# Altium PCB BMS_V3.PcbDoc (part 2 of 2)
Units mil, origin at the board's own origin, x right, y up, seen from the top; angles counter-clockwise.
Board outline 3937.01 x 3137.8 mil, 2 copper layers (Top Layer, Bottom Layer), stack 62.181 mil thick; 110 components, 133 nets, 421 pads, 75 vias.
Unrouted connection lines stored in the file: 4.
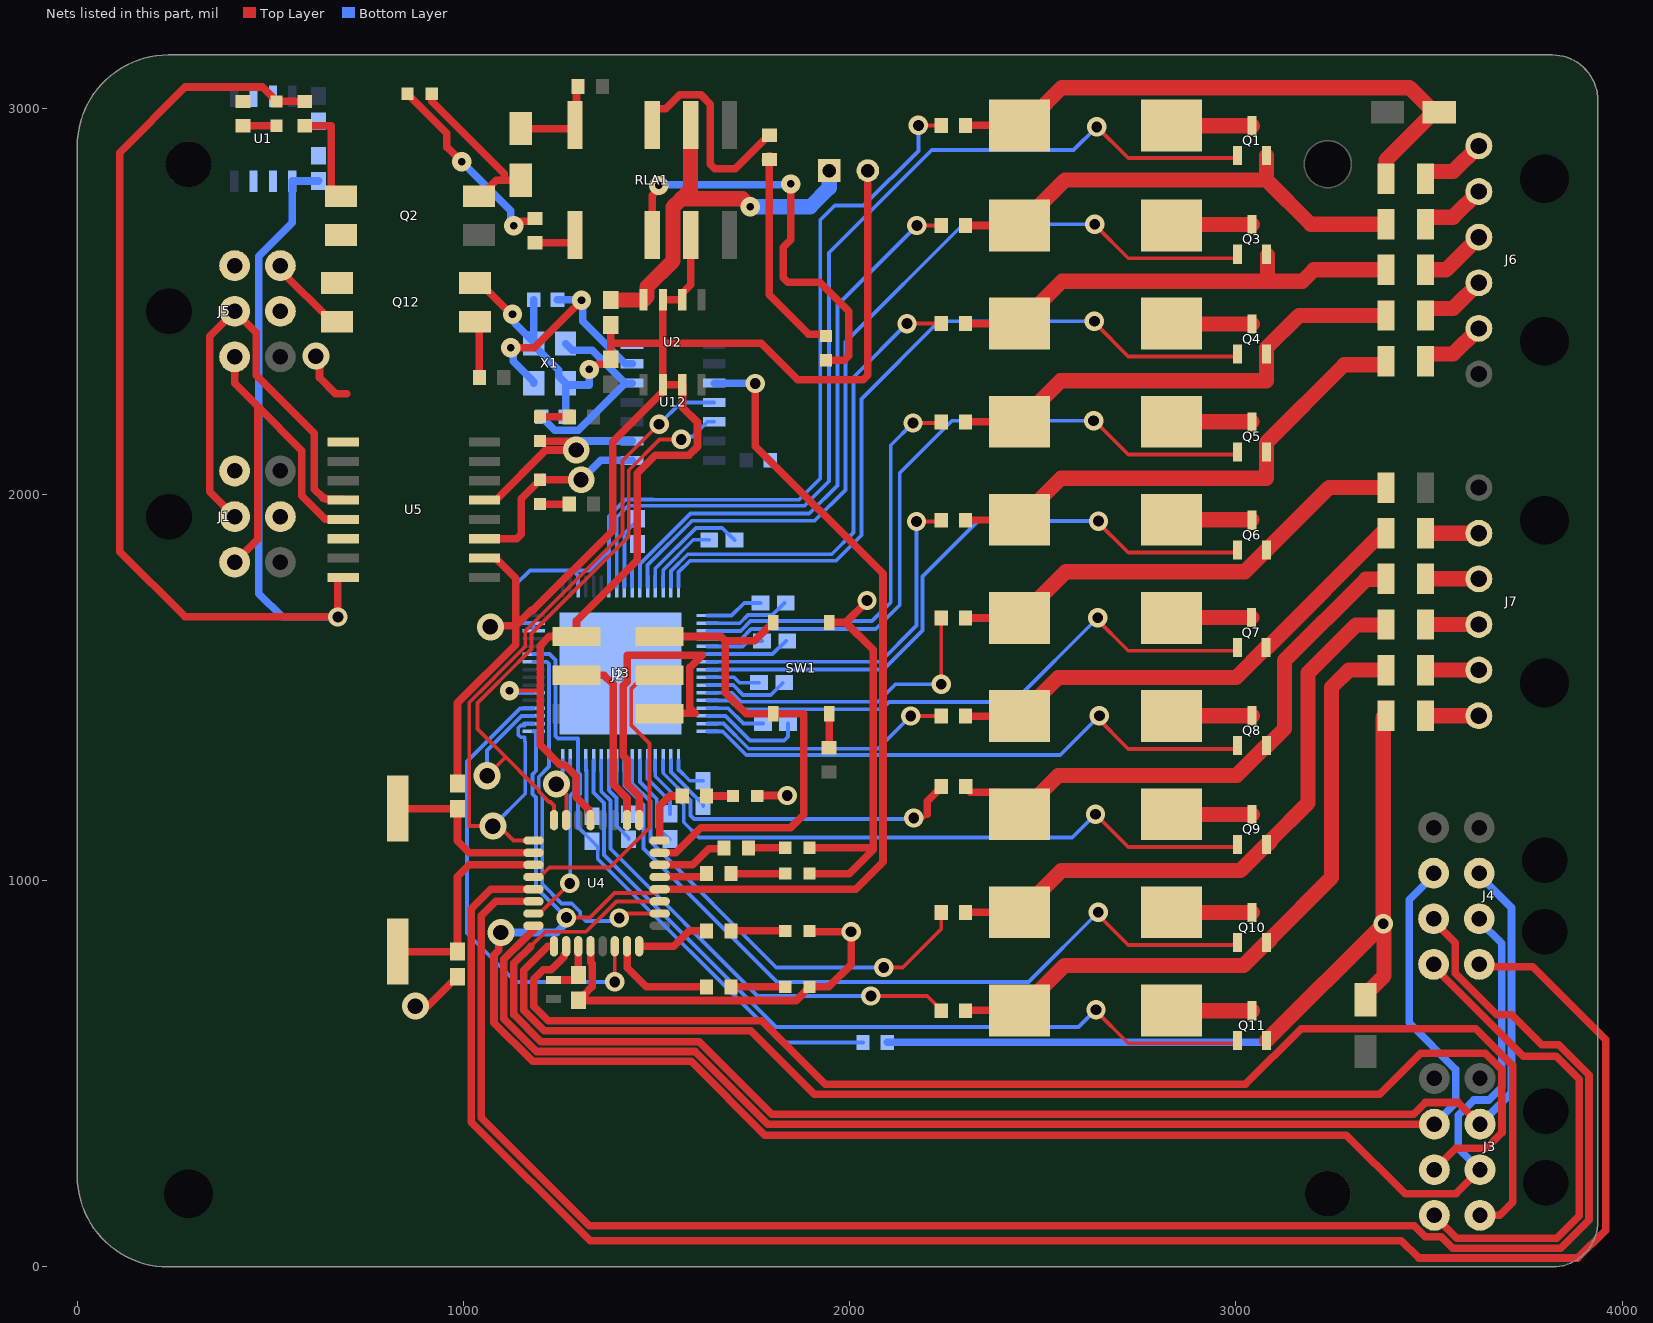
[diagram p2: the nets of this part, all layers, seen from the top]

## Via types
v1: diameter 50, hole 19.68, Top Layer to Bottom Layer, 25 vias
v2: diameter 50, hole 28, Top Layer to Bottom Layer, 24 vias
v3: diameter 50, hole 27.99, Top Layer to Bottom Layer, 14 vias
v4: diameter 70, hole 40, Top Layer to Bottom Layer, 8 vias
v5: diameter 68.9, hole 39.37, Top Layer to Bottom Layer, 4 vias

## Nets (pads, with @x,y where several pads share a name; then routed paths per layer and width w, separated by ;. In a path a pad name is that pad's centre, name@x,y a point inside that pad or via, vN(x,y) a via of type N, cw(c..) or ccw(c..) an arc to the next point about the centre after c; other vN are vias at no path point) (continued)
GLV_5V: C1.2 LED1.2 R4.2 U1.1 U5.16 | length 3750.2
  Top Layer w19.68: R4.2@589.17,3017.54 LED1.2@516.34,3017.54 478.94,3054.94 280.12,3054.94 109.84,2884.67 109.84,1852.18 279.15,1682.87 v2(674.8,1682.87) 674.8,1783.46 676.77,1785.43 U5.16@688.98,1785.43
  Bottom Layer w19.68: C1.2@624.61,2811.81 624.24,2811.45 557.01,2811.45 U1.1@556.64,2811.08 556.64,2703.51 470.01,2616.88 470.01,1743.42 530.56,1682.87 v2(674.8,1682.87)
GLV_GND: C1.1 C2.1 J1.3 J1.5 J5.3 J5.5 Q2.2 Q12.3 R6.1 U1.2 U1.3 U1.6 U1.7 U5.9 U5.14 | length 147.1
  Top Layer w19.68: v4(617.72,2358.07) 627.34,2348.44 627.34,2302.2 668.7,2260.85 697.44,2260.85
GND: C3.1 C4.1 C9.1 C17.1 C18.1 C22.2 C23.1 C24.1 J2.6 J3.8 J4.8 LED3.1 LED4.1 LED5.1 LED6.1 LED7.1 P1.2 Q12.2 RLA1.3 SW1.4 U2.2 U2.3 U2.6 U2.7 U3.6 U4.5 U4.20 U5.2 U12.7 X1.2 X1.4 | length 9385.5
  Top Layer w10: v1(1119.09,1492.13) 1197.29,1492.13 1198.28,1493.11
  Top Layer w19.68: v4(875.63,675.05) 907.94,675.05 C17.1@984.47,751.59 ; C18.1@984.47,1251.59 984.47,1460.07 1135.43,1611.03 1135.43,1660.26 ; Q12.2@1030.12,2547.05 1042.91,2547.05 1123.43,2466.54 v1(1126.97,2466.54) ; U5.2@1054.33,1835.43 1083.07,1835.43 1135.43,1783.07 1135.43,1660.26 ; v4(1069.49,1657.28) 1072.46,1660.26 1135.43,1660.26 ; v1(1325.34,2323.64) 1333.55,2323.64 1346.98,2337.08 1371.64,2337.08 1381.3,2346.74 C4.1@1381.3,2350.24 1381.3,2392.54 ; U4.20@1328.91,830.33 1329.28,829.95 1329.28,789.2 1333.18,785.31 1333.18,726.19 1310.9,703.91 1307.49,703.91 1297.83,694.25 C9.1@1297.83,690.75 1298.72,689.86 1861.13,689.86 LED4.1@1896.26,725 1945.45,725 2003.54,783.09 v3(2003.54,867.82) 1898.45,867.82 LED5.1@1896.26,870.01 ; U4.5@1328.91,1157.1 1328.91,1173.38 1324.08,1178.21 1324.08,1183.89 1291.59,1216.38 1291.59,1270.88 1261.81,1300.67 1249.05,1300.67 1198.28,1351.44 1198.28,1493.11 1198.28,1607.94 1222.64,1632.3 J2.6@1292.72,1632.3 1292.72,1673.25 1449.61,1830.14 1449.61,2055.14 1496.16,2101.69 1583.76,2101.69 1605.91,2123.84 1605.91,2187.32 1567,2226.23 1567,2283.1 U2.3@1566.34,2283.76 U2.2@1516.34,2283.76 ; C3.1@1381.3,2438.76 1381.3,2392.54 ; U2.7@1516.34,2486.26 1516.34,2393.52 1518.31,2391.56 ; U2.7@1516.34,2503.76 U2.6@1566.34,2503.76 1566.34,2521.26 1587.99,2542.91 RLA1.3@1587.99,2671.28 ; LED7.1@1760.43,1219.42 1761.54,1220.52 v3(1838.19,1220.52) ; LED6.1@1896.26,1018.52 1998.62,1018.52 2060.54,1080.44 ; LED3.1@1896.26,1085.45 2055.52,1085.45 2060.54,1080.44 ; SW1.4@1947.44,1668.52 1989.37,1668.52 ; v3(2044.88,1725.22) 2044.88,1724.04 1989.37,1668.52 ; P1.2@2046.85,2838.41 2046.85,2308.6 2035.32,2297.07 1865.75,2297.07 1771.26,2391.56 1518.31,2391.56 ; J4.8@3511.61,777.38 3743.4,545.59 3828.83,545.59 3888.39,486.04 3888.39,132.7 3830.32,74.63 3571.46,74.63 3513.58,132.5 J3.8@3513.58,133.68 ; 1135.43,1660.26 1175.29,1700.11 1179.97,1700.11 1386.42,1906.56 1386.42,2136.34 1516.34,2266.26 U2.2@1516.34,2283.76 ; 1381.3,2392.54 1382.28,2391.56 1516.34,2391.56 ; U2.2@1516.34,2283.76 1516.34,2391.56 ; 1516.34,2391.56 1518.31,2391.56 ; 1989.37,1668.52 2060.54,1597.36 2060.54,1080.44
  Bottom Layer w10: v1(1119.09,1492.13) 1125,1486.22 1146.65,1486.22 1147.07,1486.63 U3.6@1181.69,1486.63
  Bottom Layer w19.68: v1(1126.97,2466.54) 1132.77,2460.73 1132.77,2443.48 X1.2@1181.69,2394.55 ; C23.1@1181.69,2503.76 X1.2@1181.69,2394.55 ; C24.1@1264.37,2201 X1.4@1264.37,2288.25 ; v1(1325.34,2323.64) 1325.34,2283.29 1269.34,2283.29 X1.4@1264.37,2288.25 ; X1.2@1181.69,2394.55 X1.2@1181.69,2390.62 1181.69,2386.68 1246.65,2321.72 1246.65,2305.97 X1.4@1264.37,2288.25
M\R\: J3.2 J4.2 U4.27 | length 3932.5
  Top Layer w9.84: 1173.84,829.55 1212.12,867.82 1317.21,867.82 1395.85,946.47 U4.27@1508.04,946.47
  Top Layer w19.68: 1173.84,829.55 1130.32,786.03 1130.32,653.74 1200.58,583.48 1610.73,583.48 1798.63,395.59 3460.29,395.59 3490.45,425.74 3575.93,425.74 J3.2@3631.77,369.9
  Bottom Layer w19.68: J4.2@3629.8,1013.6 3713.3,930.11 3713.3,451.43 J3.2@3631.77,369.9
MISO: U3.3 U4.8 U12.12 | length 1813.4
  Top Layer w9.84: v4(1061.08,1271.72) 1109.33,1319.97 1177.51,1251.79 ; U4.8@1234.42,1157.1 1234.42,1195.13 1225.65,1203.9 1221.73,1203.9 1194.83,1230.8 1194.83,1234.72 1177.63,1251.91 1109.45,1320.09 1036.42,1393.13 1036.42,1460.25 1083.17,1507 1104.22,1528.05 1175.88,1599.71 1175.88,1639.68 1427.76,1891.56 1427.76,2062.65 1507.64,2142.54 v3(1563.58,2142.54)
  Bottom Layer w9.84: v4(1061.08,1271.72) 1061.08,1337.37 1149.92,1426.21 1181.27,1426.21 U3.3@1181.69,1426.63 ; v3(1563.58,2142.54) 1571.27,2150.22 1593.54,2150.22 1631.57,2188.25 U12.12@1649.29,2188.25
MISO_A: J2.1 U4.1 | length 940.6
  Top Layer w19.68: U4.1@1454.89,1157.1 1454.89,1218.75 1423.94,1249.7 1423.94,1313.13 1413.39,1323.68 1413.39,1504.98 1423.94,1515.53 1423.94,1583.48 1617.72,1583.48 1586.12,1551.89 1586.12,1447.37 1599.8,1433.68 1509.06,1433.68 J2.1@1507.68,1432.3 J2.1@1545.28,1432.3
MOSI: U3.2 U4.9 U12.11 | length 1941.8
  Top Layer w9.84: U4.9@1181.27,1103.95 1129.73,1103.95 1092.15,1141.54 v4(1076.38,1141.54) 1014.89,1141.54 1014.89,1461.13 1067.33,1513.57 1097.65,1543.89 1160.04,1606.28 1160.04,1646.48 1411.91,1898.35 1411.91,2087.33 v3(1506.5,2181.91)
  Bottom Layer w9.84: v4(1076.38,1141.54) 1160.04,1225.2 1160.04,1359.34 1158.8,1360.59 1158.8,1371.21 1148.17,1371.21 1141.77,1377.61 1141.77,1395.66 1148.17,1402.06 1158.8,1402.06 1158.8,1406.63 U3.2@1181.69,1406.63 ; v3(1506.5,2181.91) 1562.84,2238.25 U12.11@1649.29,2238.25
MOSI_A: J2.4 U4.2 | length 471
  Top Layer w19.68: J2.4@1292.72,1532.3 1363.78,1532.3 1387.71,1508.37 1387.71,1249.61 1423.39,1213.92 U4.2@1423.39,1157.1
NetC3_2: C3.2 P1.1 RLA1.6 U2.8 | length 1044.7
  Top Layer w39.37: C3.2@1381.3,2503.76 U2.8@1466.34,2503.76 1467.21,2503.76 1475.52,2512.07 1475.52,2537.77 1542.62,2604.87 1542.62,2744.12 1563.83,2765.33 ; RLA1.6@1587.99,2956.32 1587.99,2789.49 1563.83,2765.33 ; v1(1742.72,2744.9) 1722.29,2765.33 1563.83,2765.33
  Bottom Layer w39.37: v1(1742.72,2744.9) 1897.73,2744.9 1946.85,2794.02 P1.1@1946.85,2838.41
NetC5_1: C5.1 U3.38 | length 217.2
  Bottom Layer w9.84: U3.38@1631.69,1586.63 1800.46,1586.63 C5.1@1834.71,1620.89
NetC5_2: C5.2 U3.37 | length 147.4
  Bottom Layer w9.84: U3.37@1631.69,1606.63 1722.56,1606.63 1736.81,1620.89 C5.2@1773.21,1620.89
NetC6_1: C6.1 U3.34 | length 220.9
  Bottom Layer w9.84: U3.34@1631.69,1666.63 1715.35,1666.63 1736.62,1687.91 1799.37,1687.91 C6.1@1830.77,1719.31
NetC6_2: C6.2 U3.33 | length 151.1
  Bottom Layer w9.84: U3.33@1631.69,1686.63 1694.29,1686.63 1726.97,1719.31 C6.2@1769.27,1719.31
NetC7_1: C7.1 U3.30 | length 194.3
  Bottom Layer w9.84: U3.30@1517.11,1762.06 1517.11,1804.73 1595.08,1882.7 C7.1@1636.4,1882.7
NetC7_2: C7.2 U3.29 | length 307.6
  Bottom Layer w9.84: U3.29@1496.69,1761.63 1496.69,1807.93 1601.88,1913.12 1669.99,1913.12 C7.2@1701.4,1881.71
NetC8_1: C8.1 U3.26 | length 115.9
  Bottom Layer w9.84: U3.26@1436.69,1761.63 1436.69,1822.18 1450.48,1835.97 C8.1@1450.48,1871.85
NetC8_2: C8.2 U3.25 | length 189.2
  Bottom Layer w9.84: U3.25@1416.69,1761.63 1416.69,1899.65 1450.39,1933.35 C8.2@1450.39,1936.85
NetC9_2: C9.2 L1.2 U4.19 | length 144.2
  Top Layer w9.84: C9.2@1284.17,742.93 C9.2@1297.41,756.17
  Top Layer w19.68: L1.2@1232.87,742.93 C9.2@1284.17,742.93 ; C9.2@1297.41,756.17 U4.19@1297.41,830.33
NetC10_1: C10.1 U3.42 | length 218.8
  Bottom Layer w9.84: U3.42@1631.69,1506.63 1698.27,1506.63 1723.78,1481.12 1795.34,1481.12 C10.1@1826.83,1512.62
NetC10_2: C10.2 U3.41 | length 139.4
  Bottom Layer w9.84: U3.41@1631.69,1526.63 1700.68,1526.63 1714.69,1512.62 C10.2@1765.33,1512.62
NetC11_1: C11.1 U3.46 | length 272.7
  Bottom Layer w9.84: U3.46@1631.69,1426.63 1678.31,1426.63 1741.93,1363.01 1830.33,1363.01 1840.18,1372.85 C11.1@1840.18,1406.63
NetC11_2: C11.2 U3.45 | length 160.1
  Bottom Layer w9.84: U3.45@1631.69,1446.63 1684.69,1446.63 1724.69,1406.63 C11.2@1775.18,1406.63
NetC12_1: C12.1 U3.50 | length 152.1
  Bottom Layer w9.84: U3.50@1537.11,1311.21 1537.11,1281.21 1581.3,1237.03 1581.3,1236.57 1620.67,1197.2 C12.1@1620.67,1193.7
NetC12_2: C12.2 U3.49 | length 99.8
  Bottom Layer w9.84: U3.49@1556.69,1311.63 1556.69,1287.98 1585.75,1258.92 1620.45,1258.92 C12.2@1620.67,1258.7
NetC13_1: C13.1 U3.54 | length 237
  Bottom Layer w9.84: U3.54@1456.69,1311.63 1456.69,1255.33 1500.59,1211.44 1500.59,1139.13 C13.1@1533.34,1106.38
NetC13_2: C13.2 U3.53 | length 162.7
  Bottom Layer w9.84: U3.53@1476.69,1311.63 1476.69,1263.88 1535.04,1205.53 C13.2@1535.04,1173.07
NetC14_1: C14.1 U3.58 | length 225.6
  Bottom Layer w9.84: U3.58@1376.69,1311.63 1376.69,1233.96 1396.26,1214.39 1396.26,1142.21 1427.76,1110.71 C14.1@1427.76,1107.21
NetC14_2: C14.2 U3.57 | length 152.3
  Bottom Layer w9.84: U3.57@1396.69,1311.63 1396.69,1238.56 1427.76,1207.5 C14.2@1427.76,1172.21
NetC15_1: C15.1 R28.1 U3.11 U3.62 | length 1541.2
  Bottom Layer w9.84: U3.11@1181.69,1586.63 1222.83,1586.63 1238.29,1571.18 1238.29,1374.63 1244.69,1368.23 1296.69,1368.23 U3.62@1296.69,1311.63 1296.69,1281.23 1302.51,1275.41 1302.51,1224.24 1296.69,1218.42 1296.69,1138.74 C15.1@1333.27,1102.17 1347.85,1087.59 1347.85,1056.62 1822.95,581.52 R28.1@2034.06,581.52
NetC15_2: C15.2 U3.61 | length 151.3
  Bottom Layer w9.84: U3.61@1316.69,1311.63 1316.69,1287.98 1318.69,1285.98 1318.69,1181.74 C15.2@1333.27,1167.17
NetC17_2: C17.2 U4.11 Y1.2 | length 557.2
  Top Layer w19.68: Y1.2@830.31,816.79 830.52,816.59 C17.2@984.47,816.59 984.47,1009.87 1015.56,1040.96 U4.11@1181.27,1040.96
NetC18_2: C18.2 U4.10 Y1.1 | length 447
  Top Layer w19.68: Y1.1@830.31,1186.79 830.52,1186.59 C18.2@984.47,1186.59 984.47,1103.54 1015.56,1072.45 U4.10@1181.27,1072.45
NetD1_2: D1.2 F1.1 R2.2 R10.2 | length 1543.7
  Top Layer w10: R2.2@2508.57,2955.53 R2.2@2508.57,3012.68
  Top Layer w19.68: R10.2@2299.77,2955.53 R2.2@2439.67,2955.53 R2.2@2508.57,2955.53
  Top Layer w39.37: R2.2@2508.57,3012.68 2548.95,3053.07 3449.17,3053.07 3508.43,2993.81 3516.08,2993.81 3388.39,2866.11 F1.1@3388.39,2817.74
NetD2_1: D2.1 F11.1 Q11.2 R28.2 | length 2597
  Top Layer w39.37: Q11.2@3079.33,586.24 v2(3381.5,888.41) ; D2.1@3335.24,691.82 3335.24,705.82 3383.14,753.73 3383.53,753.73 3383.53,886.37 v2(3381.5,888.41) ; F11.1@3385.43,1427.19 3381.5,1423.25 v2(3381.5,888.41)
  Bottom Layer w19.68: R28.2@2097.05,581.52 3074.61,581.52 v2(3381.5,888.41)
NetD3_1: D3.1 R1.1 RLA1.8 | length 243
  Top Layer w19.68: D3.1@1148.42,2947.3 RLA1.8@1288.58,2947.3 ; RLA1.8@1288.58,2956.52 1292.72,2960.65 1292.72,3051.79 R1.1@1296.85,3055.93
NetD3_2: D3.2 LED10.1 Q2.4 | length 388.4
  Top Layer w19.68: 917.91,3018.52 1105.91,2830.53 1105.91,2813.3 ; Q2.4@1055.32,2783.88 1084.74,2813.3 1105.91,2813.3 ; D3.2@1148.42,2813.3 1105.91,2813.3
NetF1_2: F1.2 J6.1 | length 182.6
  Top Layer w39.37: F1.2@3490.75,2817.74 3490.75,2834.02 3492.72,2835.99 3562.34,2835.99 J6.1@3628.74,2902.38
NetF2_1: F2.1 Q1.2 R5.2 R13.2 | length 1313.8
  Top Layer w19.68: R13.2@2299.77,2696.27 R5.2@2439.67,2696.27 ; R5.2@2451.42,2696.27 R5.2@2508.57,2696.27
  Top Layer w39.37: R5.2@2439.67,2696.27 2557.19,2813.8 3079.33,2813.8 ; R5.2@2445.54,2690.4 R5.2@2451.42,2696.27 ; Q1.2@3079.33,2877.58 3079.33,2813.8 ; F2.1@3388.39,2699.63 3193.5,2699.63 3079.33,2813.8
NetF2_2: F2.2 J6.2 | length 182.6
  Top Layer w39.37: F2.2@3490.75,2699.63 3490.75,2715.91 3492.72,2717.88 3562.34,2717.88 J6.2@3628.74,2784.27
NetF3_1: F3.1 Q3.2 R7.2 R15.2 | length 1215.8
  Top Layer w10: Q3.2@3079.33,2621.67 Q3.2@3081.3,2619.71
  Top Layer w19.68: R15.2@2299.77,2442.26 R7.2@2439.67,2442.26
  Top Layer w39.37: R7.2@2439.67,2442.26 2549.39,2551.99 3171.85,2551.99 3201.38,2581.52 F3.1@3388.39,2581.52 ; 3081.3,2552.97 Q3.2@3081.3,2619.71
NetF3_2: F3.2 J6.3 | length 173.1
  Top Layer w39.37: F3.2@3490.75,2581.52 3544.09,2581.52 J6.3@3628.74,2666.16
NetF4_1: F4.1 Q4.2 R8.2 R16.2 | length 1252.7
  Top Layer w19.68: R16.2@2299.77,2188.25 R8.2@2439.67,2188.25
  Top Layer w39.37: R8.2@2439.67,2188.25 2545.53,2294.11 3079.33,2294.11 Q4.2@3079.33,2363.8 3079.33,2379.74 3162.99,2463.41 F4.1@3388.39,2463.41
NetF4_2: F4.2 J6.4 | length 182.6
  Top Layer w39.37: F4.2@3490.75,2463.41 3490.75,2479.69 3492.72,2481.66 3562.34,2481.66 J6.4@3628.74,2548.05
NetF5_1: F5.1 Q5.2 R14.2 R17.2 | length 1317.5
  Top Layer w19.68: R17.2@2299.77,1933.09 R14.2@2439.67,1934.24
  Top Layer w39.37: R14.2@2439.67,1934.24 2547.57,2042.15 3079.33,2042.15 Q5.2@3079.33,2110.35 3079.33,2134.67 3280.41,2335.74 3386.42,2335.74 3388.39,2337.71 F5.1@3388.39,2345.3
NetF5_2: F5.2 J6.5 | length 182.6
  Top Layer w39.37: F5.2@3490.75,2345.3 3490.75,2361.58 3492.72,2363.55 3562.34,2363.55 J6.5@3628.74,2429.94
NetF6_1: F6.1 Q6.2 R18.2 R19.2 | length 1228.4
  Top Layer w19.68: R19.2@2299.77,1680.23 R18.2@2439.67,1680.23
  Top Layer w39.37: R18.2@2439.67,1680.23 2559.45,1800.02 3023.43,1800.02 Q6.2@3079.33,1855.93 3241.14,2017.74 F6.1@3388.39,2017.74
NetF7_1: F7.1 Q7.2 R22.2 R25.2 | length 1281.3
  Top Layer w19.68: R22.2@2299.77,1426.22 R25.2@2439.67,1426.22
  Top Layer w39.37: R25.2@2439.67,1426.22 2539.84,1526.4 3000.62,1526.4 Q7.2@3078.18,1603.96 3081.13,1603.96 F7.1@3382.59,1905.42
NetF7_2: F7.2 J7.2 | length 138
  Top Layer w39.37: F7.2@3490.75,1899.63 J7.2@3628.74,1899.63
NetF8_1: F8.1 Q8.2 R24.2 R29.2 | length 1485.4
  Top Layer w19.68: R24.2@2300.2,1244.09 2300.2,1241.93 2312.76,1229.37 2382.51,1229.37 R29.2@2439.67,1172.21
  Top Layer w39.37: R29.2@2439.67,1172.21 2539.92,1272.46 3001.77,1272.46 Q8.2@3079.33,1350.02 3082.28,1350.02 3125.59,1393.33 3125.59,1569.7 3336.22,1780.33 3381.5,1780.33 3388.39,1773.44 F8.1@3388.39,1781.52
NetF8_2: F8.2 J7.3 | length 138
  Top Layer w39.37: F8.2@3490.75,1781.52 J7.3@3628.74,1781.52
NetF9_1: F9.1 Q9.2 R26.2 R30.2 | length 1597
  Top Layer w19.68: R26.2@2299.77,918.2 R30.2@2439.67,918.2
  Top Layer w39.37: R30.2@2439.67,918.2 2547.86,1026.4 3011.61,1026.4 Q9.2@3079.33,1094.11 3082.28,1094.11 3087.4,1099.23 3087.4,1102.19 3186.61,1201.4 3186.61,1538.21 3310.63,1662.22 3388.39,1662.22 F9.1@3388.39,1663.41
NetF9_2: F9.2 J7.4 | length 138
  Top Layer w39.37: F9.2@3490.75,1663.41 J7.4@3628.74,1663.41
NetF10_1: F10.1 Q10.2 R27.2 R31.2 | length 1743.7
  Top Layer w19.68: R27.2@2299.77,664.19 R31.2@2439.67,664.19
  Top Layer w39.37: R31.2@2439.67,664.19 2555.81,780.34 3019.49,780.34 Q10.2@3079.33,840.18 3082.28,840.18 3087.4,845.3 3087.4,848.25 3247.64,1008.48 3247.64,1500.81 3292.13,1545.3 F10.1@3388.39,1545.3
NetF10_2: F10.2 J7.5 | length 138
  Top Layer w39.37: F10.2@3490.75,1545.3 J7.5@3628.74,1545.3
NetF11_2: F11.2 J7.6 | length 138
  Top Layer w39.37: F11.2@3490.75,1427.19 J7.6@3628.74,1427.19
NetJ1_1: J1.1 J5.1 U5.13 | length 992.5
  Top Layer w19.68: J1.1@407.67,1824.63 467.13,1884.09 467.13,2228.17 ; J5.1@407.67,2356.12 407.67,2287.63 467.13,2228.17 ; U5.13@688.98,1935.43 642.72,1935.43 581.7,1996.45 581.7,2113.6 467.13,2228.17
NetJ1_2: J1.2 J5.2 U5.12 | length 1217.9
  Top Layer w19.68: J1.2@407.67,1942.74 343.11,2007.29 343.11,2409.68 J5.2@407.67,2474.23 463.51,2418.39 463.51,2308.56 613.78,2158.29 613.78,2013.58 636.42,1990.94 640.35,1990.94 643.9,1987.4 687.01,1987.4 U5.12@688.98,1985.43
NetJ5_6: J5.6 Q12.4 | length 213.6
  Top Layer w19.68: J5.6@525.86,2592.34 525.86,2581.03 659.84,2447.05 Q12.4@672.64,2447.05
NetLED1_1: LED1.1 R6.2 | length 87.6
  Top Layer w19.68: R6.2@428.74,2954.55 LED1.1@516.34,2954.55
NetLED2_1: LED2.1 RLA1.2 | length 1133
  Top Layer w19.68: RLA1.2@1488.58,2671.48 1488.58,2774.89 1505.51,2791.82 v1(1505.51,2800.02) ; v1@1852.85,2787.58 1852.85,2798.16 v1(1847.05,2803.96) 1847.05,2659.03 1828.35,2640.32 1828.35,2560.57 1839.88,2549.04 1922.83,2549.04 1997.64,2474.23 1997.64,2358.8 1986.11,2347.26 LED2.1@1938.58,2347.26
  Bottom Layer w19.68: v1(1505.51,2800.02) 1507.48,2801.99 1845.08,2801.99 v1(1847.05,2803.96)
NetLED2_2: LED2.2 R3.1 | length 542.5
  Top Layer w19.68: R3.1@1791.93,2866.95 1791.93,2516.56 1893.31,2415.18 1933.66,2415.18 LED2.2@1938.58,2410.26
  Top Layer w39.37: R3.1@1790.94,2865.96 R3.1@1791.93,2866.95
NetLED3_2: LED3.2 R9.2 | length 95.6
  Top Layer w19.68: R9.2@1737.8,1085.12 1737.96,1085.29 1833.1,1085.29 LED3.2@1833.27,1085.45
NetLED4_2: LED4.2 R11.2 | length 140.7
  Top Layer w19.68: R11.2@1692.52,725 LED4.2@1833.27,725
NetLED5_2: LED5.2 R12.2 | length 140.7
  Top Layer w19.68: R12.2@1692.52,870.01 LED5.2@1833.27,870.01
NetLED6_2: LED6.2 R20.2 | length 140.7
  Top Layer w19.68: R20.2@1692.52,1018.52 LED6.2@1833.27,1018.52
NetLED7_2: LED7.2 R21.2 | length 67.9
  Top Layer w19.68: R21.2@1629.58,1219.37 1660.09,1219.37 ; 1660.04,1219.31 1660.09,1219.37 ; LED7.2@1697.44,1219.42 1660.09,1219.37
NetLED8_1: LED8.1 U5.3 U12.1 | length 525.4
  Top Layer w19.68: U5.3@1054.33,1885.43 1137.48,1885.43 1149.21,1897.16 1149.21,1988.8 LED8.1@1198.43,2038.01 1205.11,2044.69 1211.59,2038.21 v5(1304.66,2038.21)
  Bottom Layer w19.68: v5(1304.66,2038.21) 1304.92,2038.21 1354.97,2088.25 U12.1@1436.69,2088.25
NetLED8_2: LED8.2 R36.2 | length 75.3
  Top Layer w19.68: LED8.2@1198.43,1975.02 R36.2@1273.7,1975.02
NetLED9_1: LED9.1 U5.5 U12.2 | length 561.4
  Top Layer w19.68: U5.5@1054.33,1985.43 1083.07,1985.43 1212.72,2115.09 v5(1291.99,2115.09) 1291.99,2126.28 1280.26,2138.01 LED9.1@1198.43,2138.01
  Bottom Layer w19.68: v5(1291.99,2115.09) 1291.99,2125.33 1305.09,2138.43 1436.52,2138.43 U12.2@1436.69,2138.25
NetLED9_2: LED9.2 R37.2 | length 75.3
  Top Layer w19.68: LED9.2@1198.43,2201 R37.2@1273.7,2201
NetLED10_2: LED10.2 R32.1 | length 518.6
  Top Layer w19.68: LED10.2@854.92,3037.22 957.11,2935.03 957.11,2899.6 v1(995.67,2861.04) ; v1(1130.51,2695.69) 1138.72,2695.69 1150.13,2707.11 1178.35,2707.11 R32.1@1185.63,2714.39
  Bottom Layer w19.68: v1(995.67,2861.04) 1122.64,2734.07 1122.64,2715.37 1124.71,2713.3 1124.71,2701.49 v1(1130.51,2695.69)
NetQ1_1: Q1.1 U3.24 | length 2596.4
  Top Layer w9.84: v2@2636.42,2955.53 2721.26,2870.69 Q1.1@3002.76,2870.69
  Top Layer w19.68: Q1.1@3002.76,2870.69 3004.53,2872.46 Q1.1@3004.53,2877.58
  Bottom Layer w9.84: U3.24@1396.69,1761.63 1396.69,1941.09 1426.37,1970.77 1484.01,1970.77 1484.08,1970.7 1882.88,1970.7 1946.46,2034.27 1946.46,2625.81 2212.2,2891.56 2579.33,2891.56 v2(2639.37,2951.59)
NetQ1_3: Q1.3 R2.1 | length 209.1
  Top Layer w10: R2.1@2833.17,2955.53 R2.1@2833.95,2954.74
  Top Layer w39.37: R2.1@2833.95,2954.74 Q1.3@3041.93,2954.74
NetQ2_1: Q2.1 R4.1 | length 265.2
  Top Layer w19.68: R4.1@589.17,2954.55 658.07,2954.55 658.07,2790.55 676.57,2772.05 Q2.1@682.68,2772.05
NetQ3_1: Q3.1 U3.28 | length 2215.7
  Top Layer w9.84: v2@2636.42,2696.27 2721.26,2611.43 Q3.1@3002.76,2611.43
  Top Layer w19.68: Q3.1@3002.76,2611.43 3004.53,2613.2 Q3.1@3004.53,2621.67
  Bottom Layer w9.84: U3.28@1476.69,1761.63 1476.69,1817.37 1591.24,1931.91 1909.06,1931.91 1988.78,2011.63 1988.78,2394.51 2293.9,2699.63 v2(2634.45,2699.63)
NetQ3_3: Q3.3 R5.1 | length 209.8
  Top Layer w10: R5.1@2833.17,2696.27 R5.1@2835.73,2698.84
  Top Layer w39.37: R5.1@2835.73,2698.84 Q3.3@3041.93,2698.84
NetQ4_1: Q4.1 U3.32 | length 1998.3
  Top Layer w9.84: v2@2636.42,2442.26 2721.26,2357.42 Q4.1@3002.76,2357.42
  Top Layer w19.68: Q4.1@3002.76,2357.42 3004.53,2359.19 Q4.1@3004.53,2363.8
  Bottom Layer w9.84: U3.32@1556.69,1761.63 1556.69,1799.04 1586.22,1828.56 1964.17,1828.56 2030.12,1894.51 2030.12,2246.87 2231.89,2448.64 v2(2633.46,2448.64)
NetQ4_3: Q4.3 R7.1 | length 209.3
  Top Layer w10: R7.1@2833.17,2442.26 R7.1@2834.47,2440.97
  Top Layer w39.37: R7.1@2834.47,2440.97 Q4.3@3041.93,2440.97
NetQ5_1: Q5.1 U3.36 | length 1848.5
  Top Layer w9.84: v2@2632.7,2191.97 2721.26,2103.41 Q5.1@3002.76,2103.41
  Top Layer w19.68: Q5.1@3002.76,2103.41 3004.53,2105.18 Q5.1@3004.53,2110.35
  Bottom Layer w9.84: U3.36@1631.69,1626.63 1720.15,1626.63 1744.83,1651.31 2067.43,1651.31 2129.53,1713.41 2129.53,2055.93 2264.36,2190.77 v2(2631.5,2190.77)
NetQ5_3: Q5.3 R8.1 | length 209.1
  Top Layer w10: Q5.3@3041.19,2188.25 Q5.3@3041.93,2187.51
  Top Layer w39.37: R8.1@2833.17,2188.25 Q5.3@3041.19,2188.25
NetQ6_1: Q6.1 U3.40 | length 1662.7
  Top Layer w9.84: v2@2636.42,1934.24 2721.26,1849.4 Q6.1@3002.76,1849.4
  Top Layer w19.68: Q6.1@3002.76,1849.4 3004.53,1851.17 Q6.1@3004.53,1855.93
  Bottom Layer w9.84: U3.40@1631.69,1546.63 2087.76,1546.63 2184.66,1643.54 2188.68,1647.56 2188.68,1787.79 2331.82,1930.93 v2(2644.29,1930.93)
NetQ6_3: Q6.3 R14.1 | length 209.2
  Top Layer w10: Q6.3@3040.78,1934.24 Q6.3@3041.93,1933.09
  Top Layer w39.37: R14.1@2833.17,1934.24 Q6.3@3040.78,1934.24
NetQ7_1: Q7.1 U3.44 | length 1528
  Top Layer w9.84: v2@2636.42,1680.23 2721.26,1595.39 Q7.1@3001.6,1595.39
  Top Layer w19.68: Q7.1@3001.6,1595.39 3003.38,1597.16 Q7.1@3003.38,1603.96
  Bottom Layer w9.84: U3.44@1631.69,1466.63 1690.28,1466.63 1713.19,1443.72 2083.27,1443.72 2102.08,1462.53 2423.93,1462.53 v2(2642.32,1680.93)
NetQ7_3: Q7.3 R18.1 | length 208
  Top Layer w10: R18.1@2833.17,1680.23 R18.1@2834.06,1681.12
  Top Layer w39.37: R18.1@2834.06,1681.12 Q7.3@3040.78,1681.12
NetQ8_1: Q8.1 U3.48 | length 1492.7
  Top Layer w9.84: v2@2636.42,1426.22 2721.26,1341.38 Q8.1@3002.76,1341.38
  Top Layer w19.68: Q8.1@3002.76,1341.38 3004.53,1343.15 Q8.1@3004.53,1350.02
  Bottom Layer w9.84: U3.48@1631.69,1386.63 1671.1,1386.63 1732.12,1325.61 2544.88,1325.61 v2(2646.26,1426.99)
NetQ8_3: Q8.3 R25.1 | length 209.2
  Top Layer w10: R25.1@2833.17,1426.22 R25.1@2834.13,1427.19
  Top Layer w39.37: R25.1@2834.13,1427.19 Q8.3@3041.93,1427.19
NetQ9_1: Q9.1 U3.52 | length 1706.9
  Top Layer w9.84: v2(2636.42,1172.21) 2721.26,1087.37 Q9.1@3002.76,1087.37
  Top Layer w19.68: Q9.1@3002.76,1087.37 3004.53,1089.14 Q9.1@3004.53,1094.11
  Bottom Layer w9.84: U3.52@1496.69,1311.63 1496.69,1270.45 1570.47,1196.67 1570.47,1151.4 1609.84,1112.03 2576.23,1112.03 v2(2636.42,1172.21)
NetQ9_3: Q9.3 R29.1 | length 209.1
  Top Layer w10: R29.1@2833.17,1172.21 R29.1@2834.1,1171.28
  Top Layer w39.37: R29.1@2834.1,1171.28 Q9.3@3041.93,1171.28
NetQ10_1: Q10.1 U3.56 | length 2052.6
  Top Layer w9.84: v2@2636.42,918.2 2721.26,833.36 Q10.1@3002.76,833.36
  Top Layer w19.68: Q10.1@3002.76,833.36 3004.53,835.13 Q10.1@3004.53,840.18
  Bottom Layer w9.84: U3.56@1416.69,1311.63 1416.69,1246.12 1466.14,1196.67 1466.14,1083.48 1811.61,738.01 2463.12,738.01 v2(2643.31,918.2)
NetQ10_3: Q10.3 R30.1 | length 209.1
  Top Layer w10: R30.1@2833.17,918.2 R30.1@2834.03,917.34
  Top Layer w39.37: R30.1@2834.03,917.34 Q10.3@3041.93,917.34
NetQ11_1: Q11.1 U3.60 | length 2142.1
  Top Layer w9.84: v2@2636.42,664.19 2721.26,579.35 Q11.1@3002.76,579.35
  Top Layer w19.68: Q11.1@3002.76,579.35 3004.53,581.12 Q11.1@3004.53,586.24
  Bottom Layer w9.84: U3.60@1336.69,1311.63 1336.69,1228.68 1363.78,1201.59 1363.78,1066.75 1809.47,621.06 2592.3,621.06 v2(2637.4,666.16)
NetQ11_3: Q11.3 R31.1 | length 209.1
  Top Layer w10: R31.1@2833.17,664.19 R31.1@2833.95,663.41
  Top Layer w39.37: R31.1@2833.95,663.41 Q11.3@3041.93,663.41
NetQ12_1: Q12.1 R33.1 | length 148.5
  Top Layer w19.68: Q12.1@1030.12,2447.05 1041.34,2435.83 R33.1@1041.34,2303.15
NetR3_2: R3.2 RLA1.7 | length 561.5
  Top Layer w19.68: RLA1.7@1488.58,2956.52 1488.58,2989 1498.43,2998.84 1523.52,2998.84 1559.76,3035.08 1614.94,3035.08 1639.37,3010.65 1639.37,2854.86 1650.9,2843.33 1703.15,2843.33 1789.76,2929.94 R3.2@1791.93,2929.94
NetR9_1: R9.1 U4.30 | length 186.3
  Top Layer w19.68: U4.30@1508.04,1040.96 1593.14,1040.96 1635.14,1082.96 1674.8,1082.96 R9.1@1674.8,1085.12
NetR10_1: R10.1 U3.14 U3.15 U3.19 U3.23 | length 2377.9
  Top Layer w9.84: v2(2177.76,2955.53) 2235.99,2955.53 R10.1@2236.78,2954.74
  Bottom Layer w9.84: U3.14@1181.69,1646.63 U3.15@1181.69,1666.63 1181.27,1667.06 1142.61,1667.06 1135.43,1674.23 1135.43,1766.5 1171.9,1802.97 1284.3,1802.97 ; U3.19@1296.69,1761.63 1296.69,1790.58 1284.3,1802.97 ; U3.23@1376.69,1761.63 1376.69,1854.15 ; 1923.82,2701.59 1923.82,2041.16 1869.2,1986.54 1490.64,1986.54 1490.57,1986.61 1419.81,1986.61 1376.69,1943.5 1376.69,1854.15 ; 1284.3,1802.97 1325.51,1802.97 1376.69,1854.15
  Bottom Layer w10: 1923.82,2701.59 1923.82,2710.45 1961.22,2747.85 2036.02,2747.85 2177.76,2889.59 v2(2177.76,2955.53)
NetR11_1: R11.1 U4.23 | length 282.3
  Top Layer w19.68: U4.23@1423.39,830.33 1423.77,829.95 1423.77,774.48 1473.25,725 R11.1@1629.53,725
NetR12_1: R12.1 U4.24 | length 191.1
  Top Layer w19.68: U4.24@1454.89,830.33 1544.68,830.33 1584.36,870.01 R12.1@1629.53,870.01
NetR13_1: R13.1 U3.27 | length 1474.9
  Top Layer w9.84: v2(2173.82,2696.27) R13.1@2236.78,2696.27
  Bottom Layer w9.84: U3.27@1456.69,1761.63 1456.69,1819.77 1587.53,1950.61 1895.28,1950.61 1968.11,2023.44 1968.11,2490.56 v2(2173.82,2696.27)
NetR15_1: R15.1 U3.31 | length 1240.3
  Top Layer w9.84: v2(2148.23,2442.26) R15.1@2236.78,2442.26
  Bottom Layer w9.84: U3.31@1537.11,1762.06 1537.11,1801.86 1580.54,1845.28 1953.33,1845.28 2009.45,1901.4 2009.45,2303.48 v2(2148.23,2442.26)
NetR16_1: R16.1 U3.35 | length 1067.5
  Top Layer w9.84: v2(2163.98,2184.86) 2233.52,2184.86 2236.48,2187.82 R16.1@2236.78,2187.51
  Bottom Layer w9.84: U3.35@1631.69,1646.63 1717.75,1646.63 1743.18,1672.07 2057.68,1672.07 2106.31,1720.7 2106.31,2127.19 v2(2163.98,2184.86)
NetR17_1: R17.1 U3.39 | length 914.7
  Top Layer w9.84: v2(2172.83,1929.94) 2233.63,1929.94 R17.1@2236.78,1933.09
  Bottom Layer w9.84: U3.39@1631.69,1566.63 2079.02,1566.63 2172.83,1660.45 v2(2172.83,1929.94)
NetR19_1: R19.1 U3.43 | length 805.1
  Top Layer w9.84: v2(2236.81,1508.68) R19.1@2236.78,1680.23
  Bottom Layer w9.84: U3.43@1631.69,1486.63 1695.87,1486.63 1719.09,1463.41 2073.11,1463.41 2118.39,1508.68 v2(2236.81,1508.68)
NetR20_1: R20.1 U4.29 | length 126.1
  Top Layer w19.68: U4.29@1508.04,1009.46 1508.42,1009.84 1622.24,1009.84 1629.53,1017.12 R20.1@1629.53,1018.52
NetR21_1: R21.1 U4.32 | length 158.4
  Top Layer w19.68: U4.32@1508.46,1103.95 1508.46,1193.72 1534.06,1219.31 R21.1@1566.54,1219.31
NetR22_1: R22.1 U3.47 | length 667.2
  Top Layer w9.84: v2(2158.07,1426.22) R22.1@2236.78,1426.22
  Bottom Layer w9.84: U3.47@1631.69,1406.63 1673.5,1406.63 1738.69,1341.45 2073.3,1341.45 v2(2158.07,1426.22)
NetR23_1: R23.1 SW1.3 | length 88.1
  Top Layer w19.68: R23.1@1946.85,1344.49 1947.15,1344.78 1947.15,1432.01 SW1.3@1947.44,1432.3
NetR24_1: R24.1 U3.51 | length 880.5
  Top Layer w9.84: v2(2165.94,1162.22) 2190.55,1162.22 2200.54,1172.21
  Top Layer w19.68: 2200.54,1172.21 2200.54,1205.26 2237.2,1241.93 R24.1@2237.2,1244.09
  Bottom Layer w9.84: U3.51@1517.11,1311.21 1517.11,1278.35 1587.53,1207.93 1587.53,1168.89 1596.65,1159.78 2163.5,1159.78 v2(2165.94,1162.22)
NetR26_1: R26.1 U3.55 | length 1202.3
  Top Layer w9.84: v2(2088.19,775.41) 2137.36,775.41 2236.78,874.83 R26.1@2236.78,918.2
  Bottom Layer w9.84: U3.55@1436.69,1311.63 1436.69,1252.35 1483.86,1205.18 1483.86,1101.31 1809.75,775.41 v2(2088.19,775.41)
NetR27_1: R27.1 U3.59 | length 1270.1
  Top Layer w9.84: v2(2054.72,701.59) 2200.75,701.59 2236.78,665.57 R27.1@2236.78,663.41
  Bottom Layer w9.84: U3.59@1356.69,1311.63 1356.69,1231.32 1380.42,1207.59 1380.42,1082.68 1761.51,701.59 v2(2054.72,701.59)
NetR32_2: R32.2 RLA1.1 | length 117.3
  Top Layer w19.68: R32.2@1185.63,2651.4 1278.74,2651.4 1288.58,2661.24 RLA1.1@1288.58,2671.48
NetU3_4: U3.4 U4.22 | length 1186.2
  Top Layer w9.84: U4.22@1390.35,814.37 1391.9,812.82 v3(1391.9,738.01) ; U4.22@1391.9,830.33 U4.22@1392.11,830.11
  Bottom Layer w9.84: U3.4@1181.69,1446.63 1181.27,1446.21 1146.61,1446.21 1009.45,1309.05 1009.45,863.98 1135.41,738.01 v3(1391.9,738.01)
NetU3_10: U3.10 U4.26 | length 984.2
  Top Layer w9.84: v3(1403.55,903.37) 1415.16,914.97 U4.26@1508.04,914.97
  Bottom Layer w9.84: U3.10@1181.69,1566.63 1215.85,1566.63 1221.61,1560.87 1221.61,1295.63 1194.83,1268.84 1194.83,1230.8 1203.9,1221.73 1203.9,991.16 1253.71,941.35 1280.25,941.35 1302.32,919.28 1302.32,909.87 1316.69,895.49 1395.68,895.49 v3(1403.55,903.37)
NetU3_63: U3.63 U4.15 | length 453.7
  Top Layer w9.84: U4.15@1181.27,914.97 1197.02,914.97 v3(1275.16,993.11)
  Bottom Layer w9.84: v3(1275.16,993.11) 1276.69,994.65 1276.69,1220.83 1286.67,1230.8 1286.67,1268.84 1276.69,1278.82 U3.63@1276.69,1311.63
NetU3_64: U3.64 U4.7 | length 171.6
  Top Layer w9.84: v4(1240.75,1249.82) 1265.91,1224.66 U4.7@1265.91,1157.1
  Bottom Layer w9.84: v4(1240.75,1249.82) 1240.75,1260.69 1256.69,1276.63 U3.64@1256.69,1311.63
OSC1: C23.2 U12.6 X1.1 | length 641.8
  Top Layer w19.68: v1(1122.64,2379.74) 1182.68,2379.74 v1(1305.71,2502.78)
  Bottom Layer w19.68: v1(1122.64,2379.74) 1128.44,2373.94 1128.44,2345.44 1181.69,2292.19 X1.1@1181.69,2288.25 ; C23.2@1243.5,2503.76 1304.72,2503.76 v1(1305.71,2502.78) 1308.98,2499.5 1308.98,2448.25 1418.98,2338.25 U12.6@1436.69,2338.25
OSC2: C24.2 U12.5 X1.3 | length 497
  Bottom Layer w19.68: C24.2@1202.56,2201 1202.56,2199.63 1236.12,2166.07 1296.79,2166.07 U12.5@1418.98,2288.25 ; X1.3@1264.37,2390.62 1281.15,2373.84 1333.39,2373.84 U12.5@1418.98,2288.25 ; U12.5@1436.69,2288.25 U12.5@1418.98,2288.25
RESET: J2.5 SW1.1 SW1.2 U4.31 | length 1355.8
  Top Layer w19.68: J2.5@1507.68,1632.3 1666.22,1632.3 1677.76,1620.77 ; U4.31@1508.04,1072.45 1549.6,1072.45 1614.41,1137.26 1846.69,1137.26 1880.51,1171.08 1880.51,1432.3 SW1.1@1801.77,1432.3 1732.48,1432.3 1677.76,1487.03 1677.76,1620.77 ; SW1.2@1801.77,1668.52 1801.77,1662.62 1797.83,1658.68 1791.93,1658.68 1754.02,1620.77 1677.76,1620.77
SCK: J3.3 J4.3 U3.1 U4.28 U12.10 | length 6846.4
  Top Layer w9.84: v3(1266.4,904.4) 1327.41,904.4 1391.23,968.22 1498.29,968.22 U4.28@1508.04,977.96
  Top Layer w19.68: v4(1097.05,865.96) 1091.25,860.16 1091.25,819.6 1078.95,807.3 1078.95,632.46 1179.3,532.11 1589.46,532.11 1780.21,341.36 3285.89,341.36 3437.73,189.52 3569.5,189.52 J3.3@3631.77,251.79 ; U4.28@1508.04,977.96 2015.15,977.96 2086.22,1049.04 2086.22,1794.11 1755.51,2124.82 v3(1755.51,2287.22)
  Bottom Layer w9.84: U3.1@1181.69,1386.63 1187.64,1386.63 1188.06,1386.21 1188.06,1284.48 1178.98,1275.41 1178.98,1224.24 1188.06,1215.17 1188.06,982.74 v3(1266.4,904.4)
  Bottom Layer w19.68: v4(1097.05,865.96) 1241.21,865.96 1266.4,891.15 v3(1266.4,904.4) ; U12.10@1649.29,2288.25 1649.81,2287.74 1755,2287.74 v3(1755.51,2287.22) ; J4.3@3629.8,895.49 3687.61,837.68 3687.61,464.88 3654.9,432.17 3615.07,432.17 3575.93,393.03 3575.93,307.63 J3.3@3631.77,251.79
SCK_A: J2.3 U4.12 | length 820.4
  Top Layer w9.84: U4.12@1181.27,1009.46 1197.02,1009.46 1222.01,1034.45 1378.75,1034.45 1481.56,1137.26 1481.56,1355.38 1434.16,1402.78 1434.16,1496.38 J2.3@1470.08,1532.3
  Top Layer w19.68: J2.3@1470.08,1532.3 J2.3@1507.68,1532.3
SENSOR_A: J3.4 U4.18 | length 3372.1
  Top Layer w19.68: U4.18@1265.91,830.33 1265.91,814.05 1261.09,809.22 1261.09,803.53 1227.16,769.6 1206.63,769.6 1181.69,744.67 1181.69,675.02 1219.5,637.22 1772.65,637.22 1937.22,472.64 3024.55,472.64 3168.58,616.67 3620.95,616.67 3716.14,521.48 3716.14,167.15 3682.68,133.68 J3.4@3631.77,133.68
SENSOR_B: J3.7 U4.17 | length 3269.6
  Top Layer w19.68: U4.17@1234.42,830.33 1217.9,830.33 1156.01,768.43 1156.01,664.38 1208.86,611.53 1743.89,611.53 1908.46,446.96 3371.92,446.96 3477.94,552.97 3645.78,552.97 3687.61,511.14 3687.61,424.02 3688.58,423.05 3688.58,347.74 3648.48,307.63 3569.43,307.63 J3.7@3513.58,251.79
SENSOR_C: J4.4 U4.13 | length 4745
  Top Layer w19.68: U4.13@1181.27,977.96 1180.89,977.59 1070.87,977.59 1020.52,927.23 1020.52,375.24 1327.8,67.96 3428.1,67.96 3472.81,23.26 3885.24,23.26 3957.28,95.3 3957.28,588.41 3768.31,777.38 J4.4@3629.8,777.38
SENSOR_D: J4.7 U4.14 | length 4700.3
  Top Layer w19.68: U4.14@1181.27,946.47 1083.08,946.47 1046.2,909.59 1046.2,385.88 1325.79,106.3 3461.99,106.3 3490.45,77.84 3531.92,77.84 3560.82,48.94 3840.95,48.94 3914.07,122.06 3914.07,496.68 3835.73,575.02 3791.81,575.02 3713.47,653.37 3674.85,653.37 3567.46,760.76 3567.46,839.65 J4.7@3511.61,895.49
ST_CLK: J3.6 J4.6 U4.16 | length 3537.9
  Top Layer w19.68: U4.16@1181.27,883.48 1181.27,872.43 1164.07,855.23 1163.21,855.23 1104.64,796.66 1104.64,643.1 1189.94,557.8 1600.09,557.8 1787.99,369.9 J3.6@3513.58,369.9
  Bottom Layer w19.68: J4.6@3511.61,1013.6 3448.43,950.41 3448.43,632.14 3569.43,511.14 3569.43,425.74 J3.6@3513.58,369.9
pads on no net: J1.6 J1.NC J3.NC J4.NC J5.NC J6. J7. U1.4 U1.5 U2.4 U2.5 U3.7 U3.8 U3.9 U3.16 U3.17 U3.18 U3.20 U3.21 U3.22 U4.21 U5.4 U5.6 U5.7 U5.8 U5.10 U5.11 U5.15 U12.3 U12.4 U12.8 U12.9

## Polygon pours and split planes (outlines as drawn)
GLV_GND on Top Layer "Top Layer-No Net" (solid, shelved, pour order 0): 287.99,3091.35 747.64,3091.35 747.64,1682.89 51.77,1682.89 51.77,2855.14 cw(c287.99,2855.14)
+5 on Top Layer "Top Layer-No Net 1" (solid, shelved, pour order 12): 951.77,3137.8 951.77,1473.43 0,1473.42 0,260.44 ccw(c238.9,238.9) 217.36,0 3818.9,0 ccw(c3818.94,118.07) 3937.01,118.11 3937.01,3019.68 ccw(c3818.9,3019.68) 3818.9,3137.8 1179.13,3137.8
GLV_GND on Bottom Layer "NONET_L02_P024" (solid, shelved, pour order 24): 695.87,3137.83 235.68,3138.24 ccw(c235.68,2902.56) 0,2902.56 0,1729.33 695.87,1729.33
GND on Bottom Layer "Bottom Layer-No Net" (solid, shelved, pour order 20): 951.77,3137.8 951.77,1473.07 0,1473.07 0,261.23 ccw(c239.62,239.62) 218.01,0 3819.08,0 ccw(c3819.08,118.11) 3937.19,118.11 3937.19,3019.68 ccw(c3819.08,3019.68) 3819.08,3137.79
no net on Bottom Overlay (solid, shelved): 51.77,1666.16 51.77,1441.75 986.81,1441.75 986.81,3091.36 760.43,3091.36 760.43,1666.16
no net on Top Overlay (solid, shelved): 51.77,1666.16 51.77,1441.75 986.81,1441.75 986.81,3091.36 760.43,3091.36 760.43,1666.16

## Silkscreen, mask and mechanical layers (free items; w line width, h text height)
Top Overlay:
  drawing of 1456 lines, arcs and shapes, not listed
  text "+" at 3575.39,2864 h59.06 r90
  text "-" at 3575.39,1315.77 h59.06 r90
  text "BMS V2.0.3 / 2019 Rev A" at 123.62,810.85 h49.21 r270
Bottom Overlay:
  text "+" at 3555.71,2834.47 h196.85 r90
  text "-" at 3555.71,1329.55 h196.85 r90
Mechanical 1:
  lines w10: 51.77,189.78 ccw(c287.99,189.78) 287.99,-46.44 ; 51.77,2855.14 cw(c287.99,2855.14) 287.99,3091.36 ; 69.49,197.64 69.49,2862.99 ; 236.22,3137.8 3818.9,3137.8 ; 305.71,-38.58 3888.39,-38.58 ; 3870.67,-46.44 ccw(c3870.67,71.67) 3988.78,71.67 3988.78,2973.25 ccw(c3870.67,2973.25) 3870.67,3091.36
  lines w125.98: 876.57,1725.22 876.57,2906.32

## Text inside footprints (layer, text, board x,y; h text height)
J2: Top Overlay "6" at 1325.2,1709.47 h50 r90; Top Overlay "5" at 1525.2,1709.47 h50 r90; Top Overlay "2" at 1325.2,1325.61 h50 r90; Top Overlay "1" at 1525.2,1339.3 h50 r90
U3: Bottom Overlay "*" at 1115.19,1386.63 h50 r180